# Altium PCB L-D5019-08-01.PcbDoc
Units mil, origin at the board's own origin, x right, y up, seen from the top; angles counter-clockwise.
Board outline 1574.8 x 1417.32 mil, 2 copper layers (Top Layer, Bottom Layer), stack 61.811 mil thick; 44 components, 30 nets, 136 pads, 23 vias.
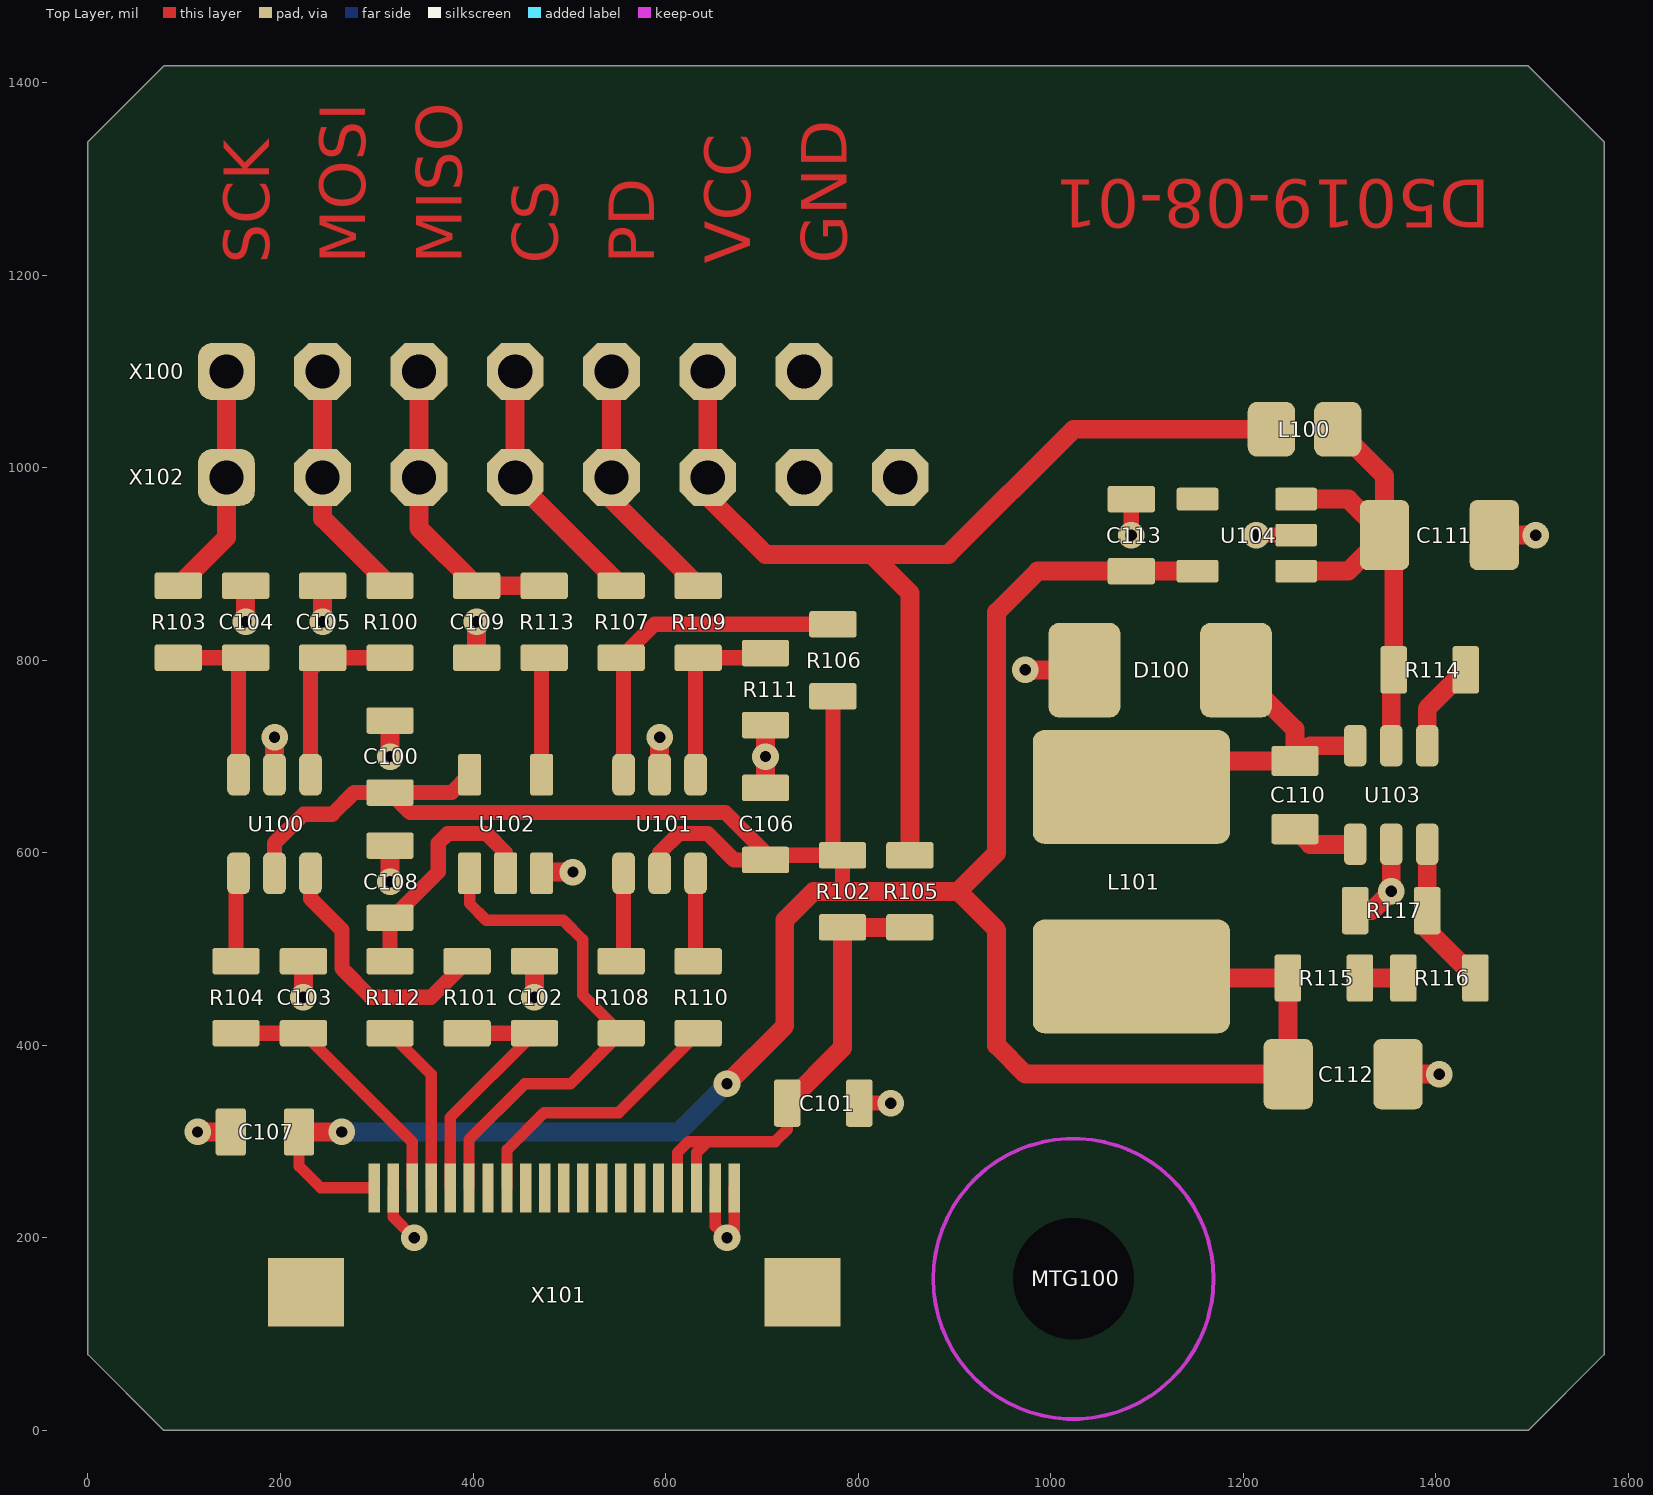
[diagram p0: Top Layer view]
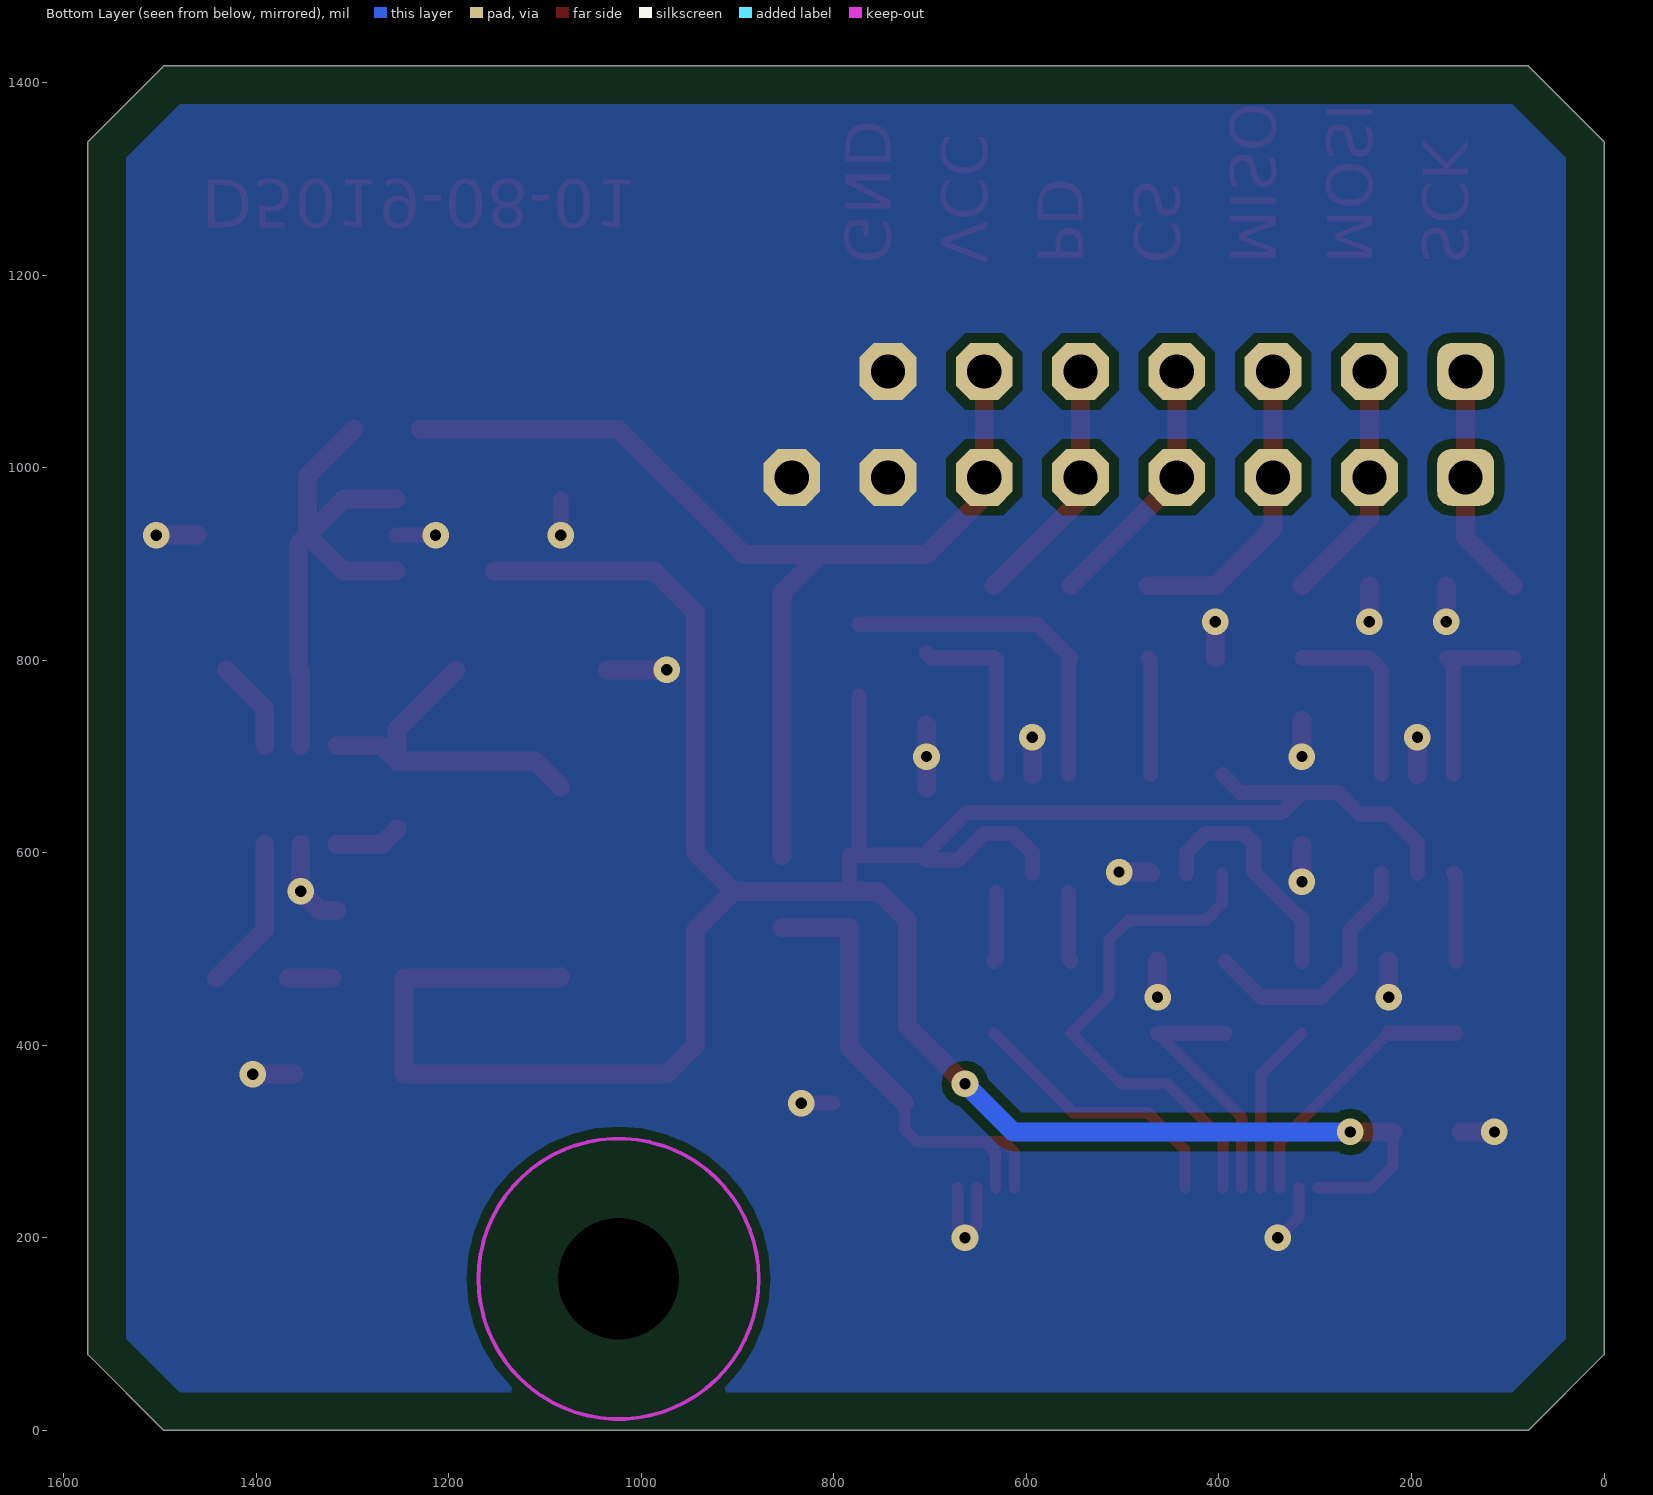
[diagram p1: Bottom Layer view, seen from below]
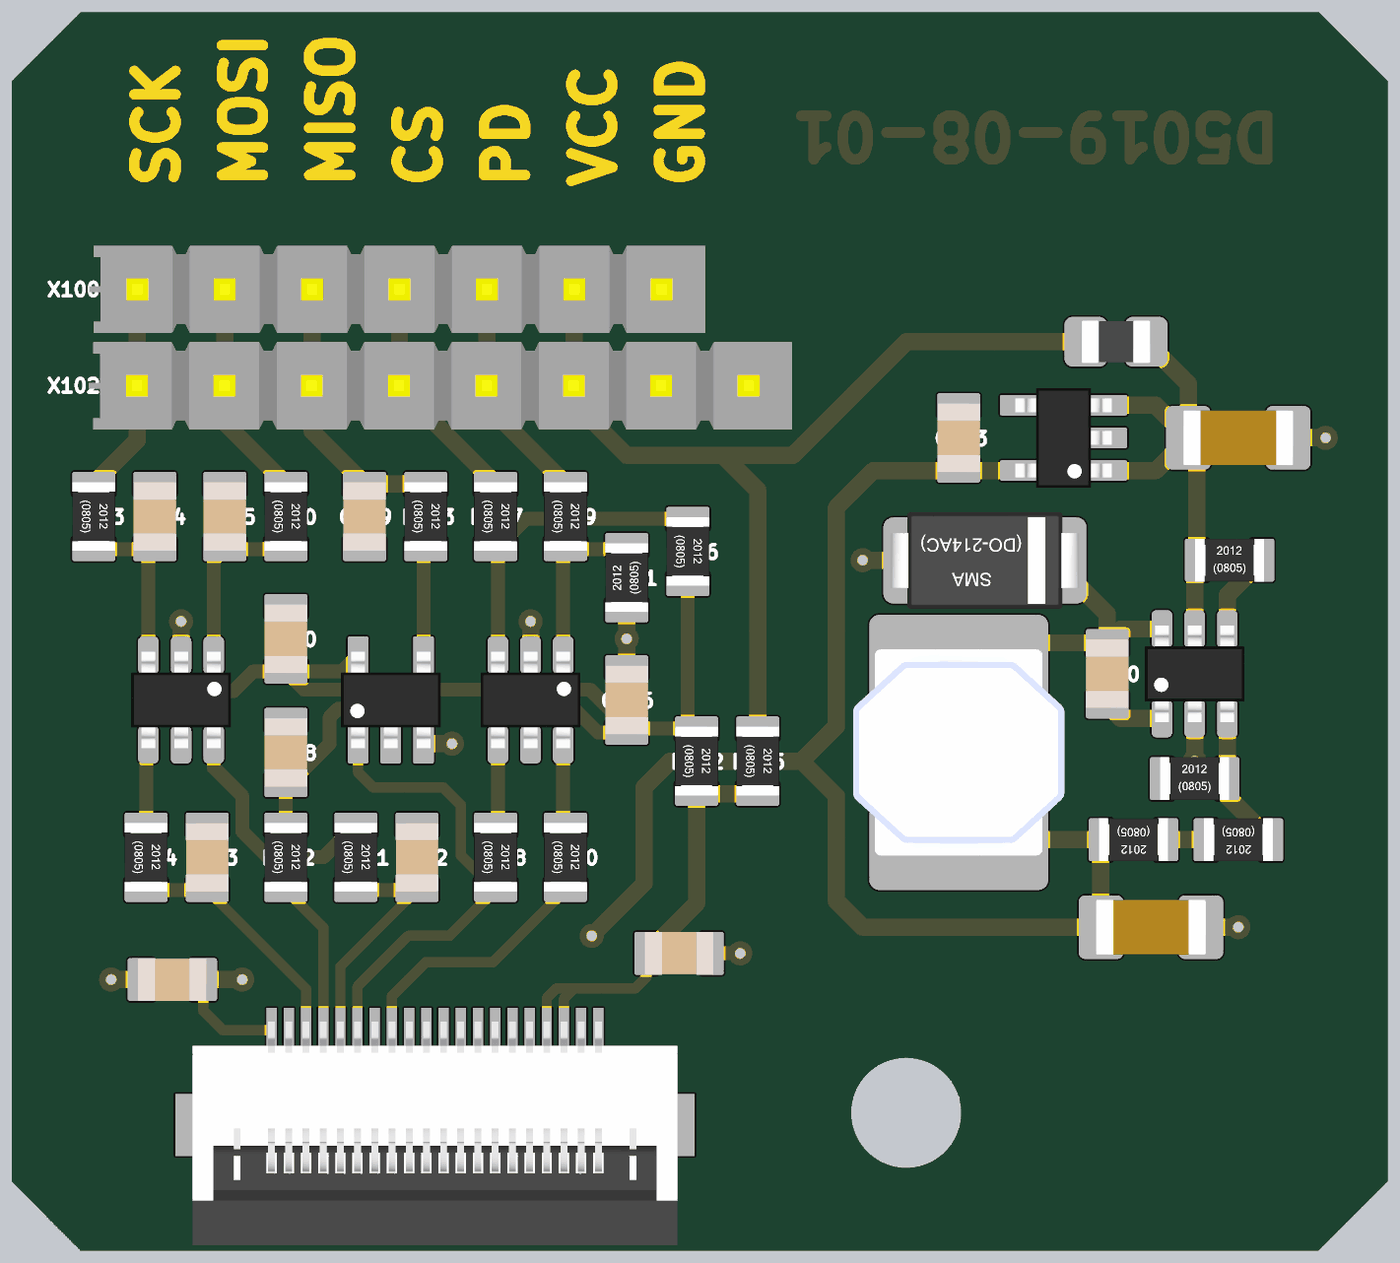
[diagram p2: 3D render of the assembled board from above, using the file's embedded part models]

## Layer stack, top to bottom
Top Solder: solder mask 0.3937, Solder Resist, Dk 3.5
Top Layer: signal copper 1.378
Dielectric 1: dielectric 59.0551, FR-4, Dk 4.8
Bottom Layer: signal copper 1.378
Bottom Solder: solder mask 0.3937, Solder Resist, Dk 3.5

## Board outline
0,78.74 0,1338.58 78.74,1417.32 1496.06,1417.32 1574.8,1338.58 1574.8,78.74 1496.06,0 78.74,0

## Design rules (kind name [scope] priority, off if disabled: settings)
BoardOutlineClearance [All] p1: gap=39.37 ignorepadtopadclearanceinfootprint=FALSE except(59.06: THPad-OutlineEdge THPad-CavityEdge THPad-CutoutEdge THPad-SplitBarrior THPad-SplitContinuation)
Clearance 16 [InNet('12V')] p1: gap=10 ignorepadtopadclearanceinfootprint=FALSE except(0: Arc-Hole Track-Hole SMDPad-Hole THPad-Hole Via-Hole Fill-Hole Poly-Hole Region-Hole Text-Hole; 16: Arc-Poly Track-Poly SMDPad-Poly THPad-Poly Via-Poly Fill-Poly Poly-Poly)
Clearance [All] p2: gap=6 ignorepadtopadclearanceinfootprint=FALSE except(0: Arc-Hole Track-Hole SMDPad-Hole THPad-Hole Via-Hole Fill-Hole Poly-Hole Region-Hole Text-Hole; 10: Arc-Poly Track-Poly SMDPad-Poly THPad-Poly Via-Poly Fill-Poly Poly-Poly) // 1
HoleSize [All] p1: absolutevalues=TRUE maxlimit=200 minlimit=11.81 maxpercent=80.000 minpercent=20.000
MinimumSolderMaskSliver [All] p1: minsoldermaskwidth=2
PasteMaskExpansion [All] p1 off: expansion=0
PolygonConnect [All] p1: connectstyle=Direct reliefconductorwidth=16 reliefentries=4 polygonreliefangle="90 Angle" airgapwidth=10
RoutingVias [All] p1: holewidth=11.81 width=23.62 viastyle="Through Hole" minholewidth=11.81 minwidth=23.62 maxholewidth=157.48 maxwidth=196.85
SilkToBoardRegionClearance [All] p1 off:
SilkToSilkClearance [All] p1 off: silktosilkclearance=10
SilkToSolderMaskClearance [IsPad] p1 off: minsilkscreentomaskgap=10 clearancetoexposedcopper=TRUE
SolderMaskExpansion [All] p1: expansion=2 istentingtop=FALSE
Width [All] p1: maxlimit=100 minlimit=8 preferedwidth=16 minimp=50.000000 maximp=50.000000 favimp=50.000000
24 further rules are at their usual default settings.

## Components (designator, comment, footprint, x,y, rotation, side; value= is the part's Value field where it differs from the comment)
C100 "100n" CAPC2012X14L#1 313.78,700 r270 top
C101 "4µ7" CAPC2012X14L#1 763.78,340 r180 top
C102 "DNP" CAPC2012X14L#1 463.78,450 r270 top
C103 "DNP" CAPC2012X14L#1 223.78,450 r270 top
C104 "DNP" CAPC2012X14L#1 163.78,840 r270 top
C105 "DNP" CAPC2012X14L#1 243.78,840 r270 top
C106 "100n" CAPC2012X14L#1 703.78,630 r270 top
C107 "4µ7" CAPC2012X14L#2 183.78,310 r0 top
C108 "DNP" CAPC2012X14L#1 313.78,570 r270 top
C109 "DNP" CAPC2012X14L#1 403.78,840 r90 top
C110 "100n" CAPC2012X14L#2 1253.78,660 r90 top
C111 "4µ7" CAPC3216X19N 1403.78,930 r180 top
C112 "22µF" CAPC3216X19N 1303.78,370 r180 top
C113 "4µ7" CAPC2012X14L#1 1083.78,930 r270 top
D100 "MBRA340T3G‎" DIOM5226X23N 1113.78,789.68 r180 top
L100 "0R0" INDC2012X10L 1263.78,1040 r0 top
L101 "NR6028T4R7M" TaiyoYuden_NR6028 1083.78,570 r270 top
MTG100 "MH_M3" HOLE_3_2MM 1023.62,157.48 r0 top
R100 "56R" RESC2012X06L 313.78,840 r270 top
R101 "56R" RESC2012X06L 393.78,450 r270 top
R102 "0R0" RESC2012X06L 783.78,560 r270 top
R103 "56R" RESC2012X06L 93.78,840 r270 top
R104 "56R" RESC2012X06L 153.78,450 r270 top
R105 "DNP" RESC2012X06L 853.78,560 r270 top
R106 "10k" RESC2012X06L 773.78,800 r270 top
R107 "56R" RESC2012X06L 553.78,840 r270 top
R108 "56R" RESC2012X06L 553.78,450 r270 top
R109 "56R" RESC2012X06L 633.78,840 r270 top
R110 "56R" RESC2012X06L 633.78,450 r270 top
R111 "10k" RESC2012X06L 703.78,770 r90 top
R112 "56R" RESC2012X06L 313.78,450 r270 top
R113 "56R" RESC2012X06L 473.78,840 r270 top
R114 "DNP" RESC2012X06L 1393.78,790 r0 top
R115 "22k" RESC2012X06L 1283.78,470 r180 top
R116 "10k" RESC2012X06L 1403.78,470 r180 top
R117 "10k" RESC2012X06L 1353.78,540 r0 top
U100 "74LVC2G17" SOT95P280X110-6N 193.78,630 r270 top
U101 "74LVC2G17" SOT95P280X110-6N 593.78,630 r270 top
U102 "74VHC1GT125" SOT95P280X110-5N 433.78,630 r90 top
U103 "RT8259GE" SOT95P280X110-6N 1353.78,660 r90 top
U104 "MIC5504-3.3YM5" SOT95P280X110-5N 1203.78,930 r180 top
X100 "1x7 2,54mm" PINH_1x07_2_54mm 443.78,1100 r0 top
X101 "WE_687120149022" WE_687120149022 484.41,120 r0 top
X102 "1x8 2,54mm" PINH_1x08_2_54mm 493.78,990 r0 top

## Footprints (in the part's own frame and the unit in brackets; to place one, negate y for a bottom-side part, rotate by r counter-clockwise, add the part's x,y. Pads: shape width x height; smd on the part's side, far side on the other; paste and mask are expansions set on the pad)
CAPC2012X14L#1 [mm] "Chip Capacitor, 2-Leads, Body 2,0x1,3mm, IPC High Density"
  rrect20% 0.7x1.25 smd: 1(-0.95,0) 2(0.95,0)
  body extent -1,-0.62 1,0.62, height 0.6
CAPC2012X14L#2 [mm] "Chip Capacitor, 2-Leads, Body 2,0x1,3mm, IPC High Density"
  rrect20% 0.8x1.25 smd: 1(-0.9,0) 2(0.9,0)
  body extent -1,-0.62 1,0.62, height 0.6
CAPC3216X19N [mm] "Chip Capacitor, 2-Leads, Body 3,2x1,6mm, IPC Medium Density"
  rrect30% 1.3x1.85 smd: 1(-1.45,0) 2(1.45,0)
  body extent -1.6,-0.8 1.6,0.8, height 1
DIOM5226X23N [mm] "Molded Diode, 2-Leads, Body 5.2x2.6mm, IPC Medium Density"
  rrect30% 1.9x2.5 smd: 1(-2,0) 2(2,0)
  body extent -2.75,-1.4 2.75,1.4, height 2.6
HOLE_3_2MM [mm] "Mouting-Hole for screws M3 with keepout for washer"
  round 0 hole 3.2 unplated: 1(0,0)
  Keep-Out Layer circle w0.1: c0,0 r3.7
INDC2012X10L [mm] "Ferrite Bead, 2-Leads, Body 2,0x1,3mm, IPC High Density"
  rrect40% 1.25x1.45 smd: 1(-0.875,0) 2(0.875,0)
  body extent -1,-0.62 1,0.62, height 0.85
PINH_1x07_2_54mm [mm] "Pin-Header 7 polig"
  rrect50% 1.5x1.5 hole 0.9: 1(-7.62,0)
  oct 1.5x1.5 hole 0.9: 2(-5.08,0) 3(-2.54,0) 4(0,0) 5(2.54,0) 6(5.08,0) 7(7.62,0)
  body extent -9.02,-1.27 8.89,1.27, height 8.38
PINH_1x08_2_54mm [mm] "Pin-Header 8 polig"
  rrect50% 1.5x1.5 hole 0.9: 1(-8.89,0)
  oct 1.5x1.5 hole 0.9: 2(-6.35,0) 3(-3.81,0) 4(-1.27,0) 5(1.27,0) 6(3.81,0) 7(6.35,0) 8(8.89,0)
  body extent -10.3,-1.28 10.15,1.26, height 8.38
RESC2012X06L [mm] "Chip Resistor, 2-Leads, Body 2,0x1,3mm, IPC High Density"
  rrect20% 0.7x1.25 smd: 1(-0.95,0) 2(0.95,0)
  body extent -1,-0.62 1,0.62, height 0.45
SOT95P280X110-5N [mm] "SOT23, 5-Leads, Body 3,0x3,0mm (max), Pitch 0,95mm, IPC Medium Density"
  rrect20% 1.1x0.6 smd: 1(-1.3,0.95) 2(-1.3,0) 3(-1.3,-0.95) 4(1.3,-0.95) 5(1.3,0.95)
  body extent -1.4,-1.45 1.4,1.45, height 1.45
SOT95P280X110-6N [mm] "SOT23, 6-Leads, Body 3,0x3,0mm (max), Pitch 0,95mm, IPC Medium Density"
  rrect50% 1.1x0.6 smd: 1(-1.3,0.95) 2(-1.3,0) 3(-1.3,-0.95) 4(1.3,-0.95) 5(1.3,0) 6(1.3,0.95)
  body extent -1.4,-1.45 1.4,1.45, height 1.45
TaiyoYuden_NR6028 [mm] "SMD Inductor, 2-Leads, Body 6,0x6.0mm"
  rrect20% 3x5.2 smd: 1(-2.5,0) 2(2.5,0)
  body extent -3,-3.07 3,3.07, height 2.58
WE_687120149022 [mm] "0.50mm SMT ZIF Horizontal Hinge Type Bottom Contact, 20p"
  rect 0.3x1.3 smd: 1(-4.75,3.35) 2(-4.25,3.35) 3(-3.75,3.35) 4(-3.25,3.35) 5(-2.75,3.35) 6(-2.25,3.35) 7(-1.75,3.35) 8(-1.25,3.35) 9(-0.75,3.35) 10(-0.25,3.35) 11(0.25,3.35) 12(0.75,3.35) 13(1.25,3.35) 14(1.75,3.35) 15(2.25,3.35) 16(2.75,3.35) 17(3.25,3.35) 18(3.75,3.35) 19(4.25,3.35) 20(4.75,3.35)
  rect 2x1.8 smd: MH1(-6.55,0.6) MH2(6.55,0.6)
  body extent -7.05,-2.9 7.05,3.6, height 2.25

## Part data
C100 C101 C102 C103 C104 C105 C106 C107 C108 C109 C110 C113: library part CAPC_0805, "0805 Chip Capacitor", PackageDescription=0805, Part Number=CAPC_0805
  C100 C102 C103 C104 C105 C106 C108 C109 C110: Bauteilart=Capacitor, Editor=rriedel, Kategorie=generic, Status=tested, Unterart=unpolarized
  C101 C107 C113: Bauteilart=Kondensator, Ersteller=rriedel, Freigabe=unchecked, ID=894, Kategorie=generisch, Mounting=SMT, Polar=u, timestamp="17.08.2016 13:43:45", Unterart=ungepolt
C111 C112: library part CAPC_1206, "1206 Chip Capacitor", Bauteilart=Capacitor, Editor=rriedel, Kategorie=generic, PackageDescription=1206, Part Number=CAPC_1206, Status=tested, Unterart=unpolarized
D100: "Schottky Gleichrichterdiode, 40V / 3A / 450mV", Manufacturer="ON Semiconductor", Bauteilart=Diode, Date=19.09.2020, Distributor_1=Digi-Key, Distributor_1_Part_Number=MBRA340T3GOSCT-ND, Editor=rriedel, Kategorie=Part, PackageDescription=SMA, Part Number=MBRA340T3G‎, Part_Number_1=MBRA340T3G‎, Status=tested, Unterart=Rectifier
L100: library part INDC_0805, "0805 Chip Inductor", Bauteilart=Inductor, Date=31.03.2019, Editor=rriedel, Kategorie=generic, PackageDescription=0805, Part Number=INDC_0805, Status=tested, Unterart=generic
L101: "4,7µH, shielded, 2,7A, 40mR", Manufacturer="Taiyo Yuden", Bauteilart=Inductor, Date=19.09.2020, Distributor_1=Digi-Key, Distributor_1_Part_Number=587-2100-1-ND, Editor=rriedel, Kategorie=Part, PackageDescription="6x6 mm", Part Number=NR6028T4R7M, Part_Number_1=NR6028T4R7M, Status=tested, Unterart=Power
MTG100: "Mounting-Hole for M3 screws", Bauteilart=Mechanic, Date=13.05.2018, Editor=rriedel, Kategorie=No_Bom, Part Number=MH_M3, Status=tested, Unterart=Holes
R100 R101 R102 R103 R104 R105 R106 R107 R108 R109 R110 R111 R112 R113 R114 R115 R116 R117: library part RESC_0805, "0805 Chip Resistor", Bauteilart=Resistor, Editor=rriedel, Kategorie=generic, PackageDescription=0805, Part Number=RESC_0805, Status=tested, Unterart=generic
U100 U101: "Dual Schmitt-Trigger Buffer with 5.5V tolerant inputs", Manufacturer=TI, Bauteilart=IC, Date=08.05.2020, Distributor_1=Digi-Key, Distributor_1_Part_Number=296-SN74LVC2G17DBVRCT-ND‎, Editor=rriedel, Kategorie=Part, PackageDescription=SOT23-6, Part Number=74LVC2G17, Part_Number_1=74LVC2G17DBVR, Status=tested, Unterart=Logic
U102: "1x Buffer with OE; 3-state,Level Shifter 3,3V to 5V and 5V to 3.3V", Manufacturer="ON Semiconductor", Bauteilart=IC, Date=21.01.2011, Distributor_1=Farnell, Distributor_1_Part_Number=1703291, Editor=rriedel, Kategorie=Part, PackageDescription=SOT23-5, Part Number=74VHC1GT125, Part_Number_1=M74VHC1G125DT1G, Status=tested, Unterart=Logic
U103: "Step-Down DC/DC Regulator, 24V, 1.2A, 1,4MHz", Manufacturer=Richtek, Bauteilart=IC, Date=31.03.2019, Distributor_1=Digi-Key, Distributor_1_Part_Number=1028-1497-1-ND, Editor=rriedel, Kategorie=Part, PackageDescription=SOT23-6, Part Number=RT8259GE, Part_Number_1=RT8259GE, Status=tested, Unterart=Switching-Regulators
U104: "300 mA LDO,  Vin=2,5V…5,5V, Vout= 3,3V, -40°C..125°C", Manufacturer=Microchip, Bauteilart=IC, Date=23.05.2019, Distributor_1=Farnell, Distributor_1_Part_Number=2510377, Editor=rriedel, Kategorie=Part, PackageDescription=SOT23-5, Part Number=MIC5504-3.3YM5, Part_Number_1=MIC5504-3.3YM5, Status=tested, Unterart=Linear-Regulators
X100: library part PINH_1x7_2_54, "Pin-Header 2,54 mm 7pins", Bauteilart=Connector, Date=07.02.2017, Editor=rriedel, Kategorie=generic, Part Number=PINH_1x7_2_54, Status=tested, Unterart=Pin-Header
X101: "20pin WR-FPC 0.50 mm SMT ZIF Horizontal - Bottom Contact", Manufacturer=Wuerth, Bauteilart=Connector, Date=25.05.2020, Distributor_1=Digi-Key, Distributor_1_Part_Number=732-6002-1-ND, Editor=rriedel, Kategorie=Part, PackageDescription="FPC 0.5mm", Part Number=WE_687120149022, Part_Number_1=6.8712014902e+011, Status=tested, Unterart=FPC
X102: library part PINH_1x8_2_54, "Pin-Header 2,54 mm 8pins", Bauteilart=Connector, Date=07.02.2017, Editor=rriedel, Kategorie=generic, Part Number=PINH_1x8_2_54, Status=tested, Unterart=Pin-Header

## Via types
v1: diameter 27.56, hole 11.81, Top Layer to Bottom Layer, tented both sides, 23 vias

## Nets (pads, with @x,y where several pads share a name; then routed paths per layer and width w, separated by ;. In a path a pad name is that pad's centre, name@x,y a point inside that pad or via, vN(x,y) a via of type N, cw(c..) or ccw(c..) an arc to the next point about the centre after c; other vN are vias at no path point)
3V3: C100.2 C106.2 C107.2 C112.2 C113.2 L101.2 R102.1 R106.2 R115.2 U100.5 U101.5 U102.5 U104.5 X101.1 | length 3385.9
  Top Layer w11.81: C107.2 219.21,274.57 241.89,251.89 X101.1
  Top Layer w15.75: U100.5 193.78,610 223.78,640 253.78,640 276.38,662.6 C100.2 ; U102.5 377.8,662.6 C100.2 ; U101.5 593.78,600 613.78,620 643.78,620 671.18,592.6 C106.2 ; R106.2 R102.1@773.78,597.4 ; 783.78,560 R102.1 R102.1@773.78,597.4 ; C100.2 334.63,641.75 662.03,641.75 703.78,600 C106.2 ; C106.2 708.58,597.4 R102.1@773.78,597.4
  Top Layer w19.68: C107.2 v1(263.78,310) ; v1(663.78,360) 723.78,420 723.78,530 753.78,560 783.78,560 903.78,560 ; L101.2 1085.35,470 R115.2 1246.38,370.31 C112.2 973.78,370 943.78,400 943.78,520 903.78,560 ; U104.5 C113.2 986.38,892.6 943.78,850 943.78,600 903.78,560
  Bottom Layer w19.68: v1(263.78,310) 613.78,310 v1(663.78,360)
CS_TFT_3V3: R108.2 U102.1 X101.6 | length 532.2
  Top Layer w11.81: X101.6 395.83,302.05 453.78,360 501.18,360 R108.2 513.78,452.6 513.78,510 493.78,530 413.78,530 396.38,547.4 U102.1
GND: C100.1 C101.1 C102.1 C103.1 C104.1 C105.1 C106.1 C107.1 C108.1 C109.1 C111.1 C112.1 C113.1 D100.2 R111.1 R117.1 U100.2 U101.2 U102.3 U103.2 U104.2 X100.7 X101.2 X101.19 X101.20 X102.7 X102.8 | length 998
  Top Layer w11.81: X101.2 317.09,221.69 v1(338.78,200) ; X101.19 651.73,212.05 v1(663.78,200) 671.42,207.64 X101.20
  Top Layer w15.75: C101.1 v1(833.78,340) ; v1(1083.78,930) C113.1 ; v1(1213.78,930) U104.2
  Top Layer w19.68: v1(113.78,310) C107.1 ; v1(163.78,840) C104.1 ; U100.2 v1(193.78,720) ; v1(223.78,450) C103.1 ; v1(243.78,840) C105.1 ; v1(313.78,570) C108.1 ; v1(313.78,700) C100.1 ; C109.1 v1(403.78,840) ; v1(463.78,450) C102.1 ; U102.3 472.36,580 v1(503.78,580) ; U101.2 v1(593.78,720) ; C106.1 v1(703.78,700) R111.1 ; v1(973.78,790) 1034.72,790 D100.2 ; R117.1 1333.78,540 v1(1353.78,560) U103.2 ; C112.1 v1(1403.78,370) ; C111.1 v1(1503.78,930)
MISO_3V3: R112.2 X101.4 | length 178.4
  Top Layer w11.81: R112.2 356.46,369.92 X101.4
MOSI_3V3: C102.2 R101.2 X101.5 | length 267
  Top Layer w11.81: X101.5 376.14,324.96 C102.2
  Top Layer w15.75: R101.2 C102.2
NetC101_2: C101.2 R102.2 R105.2 X101.17 X101.18 | length 517.4
  Top Layer w11.81: X101.17 612.36,288.58 623.78,300 643.78,300 ; X101.18 632.05,288.27 643.78,300 ; C101.2 726.38,312.6 713.78,300 643.78,300
  Top Layer w19.68: C101.2 783.78,397.4 R102.2 R105.2
NetC104_2: C104.2 R103.2 U100.3 | length 194.5
  Top Layer w15.75: R103.2 C104.2 156.38,795.2 U100.3
NetC105_2: C105.2 R100.2 U100.1 | length 196.6
  Top Layer w15.75: U100.1 231.18,790 C105.2 R100.2
NetC108_2: C108.2 R112.1 U102.2 | length 248.4
  Top Layer w15.75: R112.1 C108.2 316.38,532.6 363.78,580 363.78,610 373.78,620 413.78,620 433.78,600 U102.2
NetC110_1: C110.1 U103.1 | length 69.1
  Top Layer w19.68: C110.1 1269.53,608.82 U103.1
NetC110_2: C110.2 D100.1 L101.1 U103.6 | length 369.9
  Top Layer w19.68: L101.1 1110.79,695.43 C110.2 ; D100.1 1253.78,728.43 C110.2 ; U103.6 1269.53,711.18 C110.2
NetC111_2: C111.2 L100.2 R114.1 U103.5 U104.1 U104.3 | length 568.4
  Top Layer w19.68: U104.1 1309.29,892.6 C111.2 ; U104.3 1309.29,967.4 C111.2 ; L100.2 1346.69,991.54 C111.2 ; U103.5 1353.78,787.4 R114.1 1356.38,920.31 C111.2
NetR101_1: R101.1 U100.6 | length 270.2
  Top Layer w15.75: U100.6 231.18,552.6 263.78,520 263.78,480 293.78,450 356.38,450 R101.1
NetR104_1: R104.1 U100.4 | length 92.5
  Top Layer w15.75: R104.1 153.78,576.22 U100.4
NetR106_1: R106.1 R107.2 U101.3 | length 356.9
  Top Layer w15.75: U101.3 556.38,800 R107.2 588.58,837.4 R106.1
NetR108_1: R108.1 U101.4 | length 72.5
  Top Layer w15.75: R108.1 556.38,490 U101.4@556.38,558.82
NetR109_2: R109.2 R111.2 U101.1 | length 194.5
  Top Layer w15.75: U101.1 631.18,800 R109.2 698.98,802.6 R111.2
NetR110_1: R110.1 U101.6 | length 72.5
  Top Layer w15.75: U101.6@631.18,558.82 631.18,490 R110.1
NetR113_2: R113.2 U102.4 | length 122.5
  Top Layer w15.75: U102.4 471.18,800 R113.2
NetR114_2: R114.2 U103.4 | length 95.4
  Top Layer w19.68: U103.4 1391.18,750 R114.2
NetR115_1: R115.1 R116.2 | length 45.2
  Top Layer w19.68: R115.1 R116.2
NetR116_1: R116.1 R117.2 U103.3 | length 159.5
  Top Layer w19.68: U103.3 R117.2 1391.18,520 R116.1
PD_TFT_3V3: R110.2 X101.8 | length 288.3
  Top Layer w11.81: X101.8 435.2,291.42 473.78,330 551.18,330 R110.2
SCK_3V3: C103.2 R104.2 X101.3 | length 277.5
  Top Layer w11.81: C103.2 336.77,299.61 X101.3
  Top Layer w15.75: R104.2 C103.2
VCC: L100.1 R105.1 X100.6 X102.6 | length 1123.4
  Top Layer w19.68: X100.6 X102.6 643.78,970 703.78,910 813.78,910 ; R105.1 853.78,870 813.78,910 ; L100.1 1023.78,1040 893.78,910 813.78,910
X_CS_TFT: R107.1 X100.4 X102.4 | length 268.2
  Top Layer w19.68: X100.4 X102.4 443.78,987.4 R107.1
X_MISO: C109.2 R113.1 X100.3 X102.3 | length 317.5
  Top Layer w19.68: X100.3 X102.3 343.78,937.4 C109.2 R113.1
X_MOSI: R100.1 X100.2 X102.2 | length 251.6
  Top Layer w19.68: X100.2 X102.2 243.78,947.4 R100.1
X_PD_TFT: R109.1 X100.5 X102.5 | length 259.9
  Top Layer w19.68: X100.5 X102.5 543.78,967.4 R109.1
X_SCK: R103.1 X100.1 X102.1 | length 243.3
  Top Layer w19.68: R103.1 143.78,927.4 X102.1 X100.1
pads on no net: MTG100.1 U104.4 X101.7 X101.9 X101.10 X101.11 X101.12 X101.13 X101.14 X101.15 X101.16 X101.MH1 X101.MH2

## Polygon pours and split planes (outlines as drawn)
GND on Bottom Layer "GND_L02_P000" (solid, remove dead copper, pour order 0): 0,1417.32 0,10 1574.8,10 1574.8,1417.32

## Other copper
Top Layer:
  text "D5019-08-01" at 1456.69,1299.21 h50 r180
  text "SCK" at 188.19,1211.81 h47.24 r90
  text "MOSI" at 288.19,1211.81 h47.24 r90
  text "MISO" at 388.19,1211.81 h47.24 r90
  text "CS" at 488.19,1211.81 h47.24 r90
  text "PD" at 588.19,1211.81 h47.24 r90
  text "VCC" at 688.19,1211.81 h47.24 r90
  text "GND" at 788.19,1211.81 h47.24 r90

## Silkscreen, mask and mechanical layers (free items; w line width, h text height)
Top Solder:
  text "SCK" at 188.19,1211.81 h47.24 r90
  text "MOSI" at 288.19,1211.81 h47.24 r90
  text "MISO" at 388.19,1211.81 h47.24 r90
  text "CS" at 488.19,1211.81 h47.24 r90
  text "PD" at 588.19,1211.81 h47.24 r90
  text "VCC" at 688.19,1211.81 h47.24 r90
  text "GND" at 788.19,1211.81 h47.24 r90
M1_Dimension:
  the board outline again, w10

## Dimensions
78.74,1417.32 to 1496.06,0 on M2_Measures
0,1338.58 to 1574.8,1338.58 on M2_Measures